# EAGLE board rx (EAGLE 9.1.3)
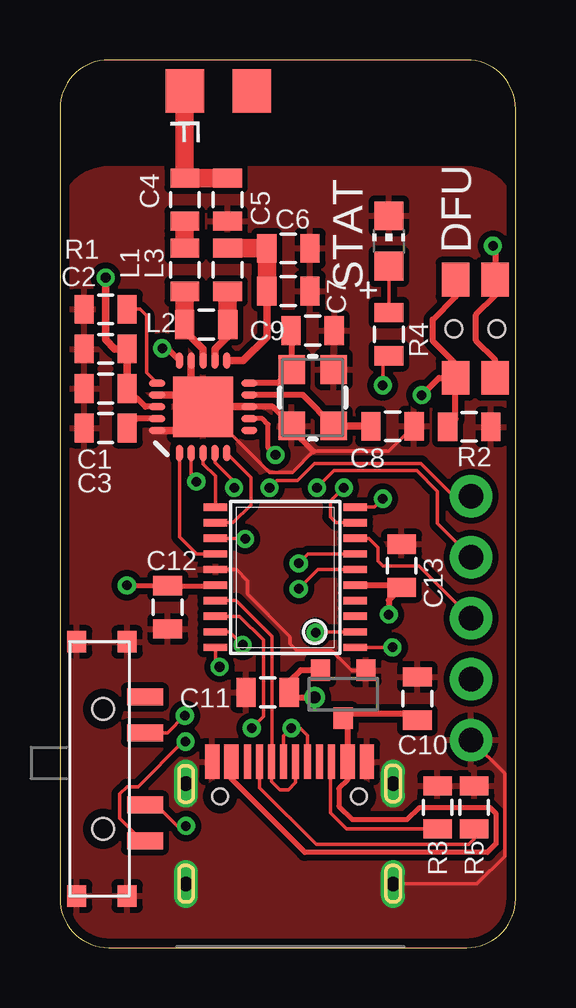
[diagram p0: board, top side]
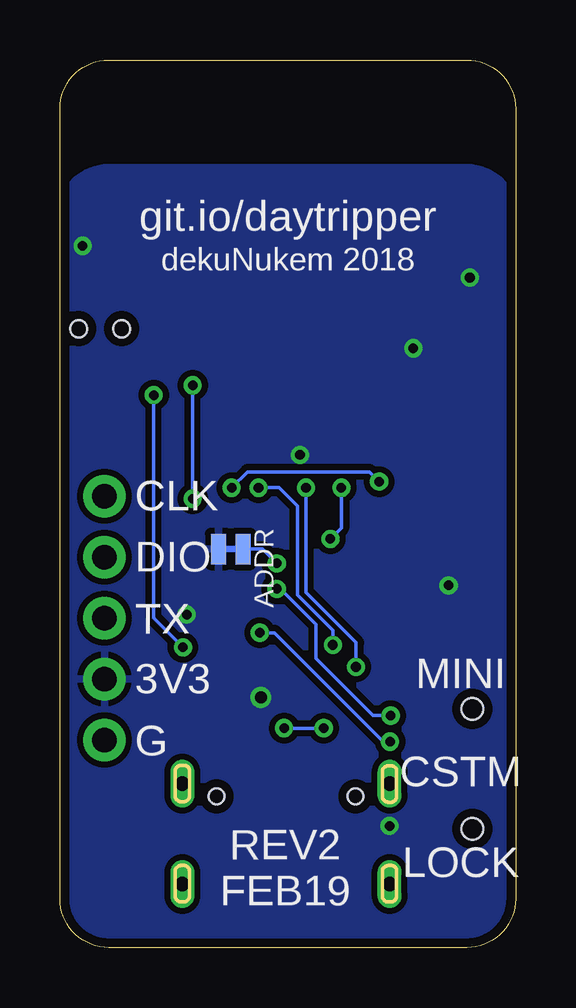
[diagram p1: board, bottom side, seen from below]

Size 19 x 37 mm. Coordinates in mm from the lower left corner, seen from the top.
Outline: 19,2.03 19,34.97 arc90 16.97,37 2.03,37 arc90 0,34.97 0,2.03 arc90 2.03,0 16.97,0 arc90 19,2.03
Copper layers (1*16): Top 0.035mm / dielectric 1.5mm / Bottom 0.035mm
Design rules "SparkFun-2-layer-TIGHT *": minimum track width 6mil, minimum drill 15mil, track to track 6mil, track to pad 6mil, pad to pad 6mil, via to via 6mil, smd to smd 6mil, copper to edge 15mil, drill to drill 6mil, minimum pad ring 7mil, minimum via ring 7mil, stop-mask expansion 4mil, vias tented up to drill 25mil, thermal gap 10mil

## Footprints (pad centres in the part's own frame; a part is rotated, then mirrored left to right if it is on the bottom)
0805 = smd 0.8 x 1.2: 1 -0.9,0; 2 0.9,0
CHIP-LED0805 = smd 1.2 x 1.2: A 0,-1.05; C 0,1.05
SMT-JUMPER_2_NC_TRACE_NO-SILK = smd 0.635 x 1.27: 1 -0.508,0; 2 0.508,0
SW_3POS_FOOT_OFFICIAL = smd 0.9 x 0.8: P$1 0,0; P$2 0,2.1; P$4 10.6,2.1; P$5 10.6,0 | smd 0.7 x 1.5: P$3 2.3,2.85; P$6 3.8,2.85; P$7 6.8,2.85; P$8 8.3,2.85 | hole 0.9: 2.8,1.1; 7.8,1.1
TSSOP20 = smd 0.305 x 0.991: 1 -2.925,-2.918; 2 -2.275,-2.918; 3 -1.625,-2.918; 4 -0.975,-2.918; 5 -0.325,-2.918; 6 0.325,-2.918; 7 0.975,-2.918; 8 1.625,-2.918; 9 2.275,-2.918; 10 2.925,-2.918; 11 2.925,2.918; 12 2.275,2.918; 13 1.625,2.918; 14 0.975,2.918; 15 0.325,2.918; 16 -0.325,2.918; 17 -0.975,2.918; 18 -1.625,2.918; 19 -2.275,2.918; 20 -2.925,2.918
QFN20_ALT1 = smd 2.515 x 2.515: 0 0,0 | smd 0.686 x 0.293: 1 -1.925,0.986; 2 -1.925,0.493; 3 -1.925,0; 4 -1.925,-0.493; 5 -1.925,-0.986; 11 1.925,-0.986; 12 1.925,-0.493; 13 1.925,0; 14 1.925,0.493; 15 1.925,0.986 | smd 0.293 x 0.686: 6 -0.986,-1.925; 7 -0.493,-1.925; 8 0,-1.925; 9 0.493,-1.925; 10 0.986,-1.925; 16 0.986,1.925; 17 0.493,1.925; 18 0,1.925; 19 -0.493,1.925; 20 -0.986,1.925
SOT23R_INFINEON = smd 0.8 x 0.9: 1 -0.95,-1; 2 0.95,-1; 3 0,1
1X05 = drill 1.016 pad 1.778: 1 -6.35,0; 2 -3.81,0; 3 -1.27,0; 4 1.27,0; 5 3.81,0
USBC_16P_FOOT = smd 0.6 x 1.45: A1B12 0,0; A4B9 0.8,0; B4A9 5.65,0; B11A12 6.45,0 | smd 0.3 x 1.45: A5 1.975,0; A6 2.975,0; A7 3.475,0; A8 4.475,0; B5 4.975,0; B6 3.975,0; B7 2.475,0; B8 1.475,0 | drill 0.6 pad 1 long: P$13 -1.095,-0.915; P$14 7.545,-0.915; P$15 -1.095,-5.095; P$16 7.545,-5.095 | hole 0.65: 0.335,-1.445; 6.115,-1.445
C1206 = smd 1.6 x 1.8: 1 -1.4,0; 2 1.4,0
342_SWICH_FOOT_HOLE = smd 1.4 x 1.15: P$1 -2.05,-0.825; P$2 -2.05,0.825; P$3 2.05,0.825; P$4 2.05,-0.825 | hole 0.7: 0,0.9; 0,-0.9
CRYSTAL-SMD-3.2X2.5MM = smd 1.2 x 1.1: 1 -1.175,-0.875; 2 1.175,-0.875; 3 1.175,0.875; 4 -1.175,0.875

## Placement (x,y rotation side)
C1  100nF  [0805]  1.91,23.3 180 top
C2  2.2nF  [0805]  1.91,24.96 180 top
C3  100nF  [0805]  1.91,21.65 180 top
C4  1.5pF  [0805]  5.21,31.18 90 top
C5  1pF  [0805]  6.99,31.18 270 top
C6  2.2nF  [0805]  9.53,29.15 0 top
C7  4.7pF  [0805]  9.53,27.37 0 top
C8  22pF  [0805]  13.87,21.73 0 top
C9  22pF  [0805]  10.54,25.72 0 top
C10  4.7uF  [0805]  14.91,10.38 90 top
C11  4.7uF  [0805]  8.66,10.63 180 top
C12  100nF  [0805]  4.5,14.18 270 top
C13  100nF  [0805]  14.25,15.92 90 top
L1  3.9nH  [0805]  5.21,28.26 90 top
L2  8.2nH  [0805]  6.1,25.97 0 top
L3  2.7nH  [0805]  6.99,28.26 90 top
LED2  [CHIP-LED0805]  13.72,29.45 0 top
R1  22K  [0805]  1.91,26.61 180 top
R2  22K  [0805]  17.07,21.7 0 top
R3  5.1K  [0805]  15.75,5.84 90 top
R4  5.1K  [0805]  13.72,25.57 270 top
R5  5.1K  [0805]  17.27,5.84 90 top
SJ1  JUMPER-SMT_2_NC_TRACE_NO-SILK  [SMT-JUMPER_2_NC_TRACE_NO-SILK]  11.88,16.61 0 bottom
U$1  SW_3POS_DEVSW_3POS_OFFICIAL  [SW_3POS_FOOT_OFFICIAL]  0.7,12.75 270 top
U$2  STM32F042F4  [TSSOP20]  9.4,15.43 90 top
U$3  NRF24L01ALT1  [QFN20_ALT1]  5.97,22.54 90 top
U$4  XC6206_DEV  [SOT23R_INFINEON]  11.81,10.56 180 top
U$5  PINHD5  [1X05]  17.14,12.46 270 top
U$6  USBC_16P  [USBC_16P_FOOT]  6.35,7.75 0 top
U$7  1206ANT_DEV  [C1206]  6.6,35.71 0 top
U$10  324_SW324_SWITCH_FOOT_HOLE  [342_SWICH_FOOT_HOLE]  17.32,25.79 90 top
Y1  CRYSTAL-26MHZSMD-3.2X2.5  [CRYSTAL-SMD-3.2X2.5MM]  10.54,22.92 90 top

## Library data of the parts
C1-C13 = clock
L1-L3 = basicBoard
LED2 R1-R5 = joyAnalog
SJ1 = SparkFun-Jumpers
U$1 U$4 U$7 U$10 = 3pos_slide_switch
U$2 = tx
U$3 = nRF24L01-Chip-v13
U$5 = adafruit_changed
U$6 = my_usbc_16p
Y1 = SparkFun-Clocks; PROD_ID: XTAL-12454

## Nets
+3V3: C1.1 C2.1 C11.1 C12.1 C13.1 SJ1.1 U$1.P$7 U$2.5 U$2.16 U$3.7 U$3.15 U$3.18 U$4.2 U$5.4 U$10.P$1 U$10.P$4
+5V: C10.1 U$4.3 U$6.A4B9 U$6.B4A9
GND: C1.2 C2.2 C3.2 C5.2 C6.2 C7.2 C8.2 C9.2 C10.2 C11.2 C12.2 C13.2 LED2.C R1.2 R2.2 R3.2 R5.2 U$1.P$1 U$1.P$2 U$1.P$4 U$1.P$5 U$2.15 U$3.0 U$3.8 U$3.14 U$3.17 U$3.20 U$4.1 U$5.5 U$6.A1B12 U$6.B11A12 U$6.P$13 U$6.P$14 U$6.P$15 U$6.P$16 Y1.2 Y1.4
N$1: C3.1 U$3.19
N$2: R1.1 U$3.16
N$3: L1.1 L2.1 U$3.13
N$4: C4.1 L1.2
N$5: C4.2 C5.1 U$7.1
N$6: L2.2 L3.1 U$3.12
N$7: C8.1 U$3.9 Y1.1
N$8: C6.1 C7.1 L3.2 U$3.11
N$9: C9.1 U$3.10 Y1.3
N$10: U$1.P$8 U$2.2
N$11: R2.1 U$2.1 U$10.P$2 U$10.P$3
N$12: U$2.17 U$6.A7 U$6.B7
N$13: U$2.18 U$6.A6 U$6.B6
N$14: U$2.12 U$3.5
N$15: U$2.13 U$3.4
N$16: U$2.11 U$3.3
N$17: U$2.19 U$5.2
N$18: LED2.A R4.1
N$19: SJ1.2 U$2.7
N$20: U$2.20 U$5.1
N$21: U$2.8 U$5.3
N$22: U$2.14 U$3.1
N$23: R4.2 U$2.10
N$24: U$2.9 U$3.2
N$25: R3.1 U$6.B5
N$26: U$1.P$6 U$2.6
N$27: R5.1 U$6.A5

## Tracks (layer width: path | path; a pad name or v marks a point on that pad's centre or on a via)
+3V3  (via drill 0.4, 0.5)
  Top 0.152: v5.26,5.07 4.89,5.07 4.01,5.95 U$1.P$7
  Top 0.203: U$3.7 8.44,22.05 8.69,21.81 8.69,20.84 v8.99,20.54 | v2.79,15.1 4.48,15.1 C12.1 6.45,15.08 U$2.16
  Top 0.254: U$3.15 4.47,24.98 v4.27,24.98 | U$3.18 3.57,22.54 C1.1 | v13.72,13.88 13.72,14.48 C13.1 14.16,15.11 U$2.5 | U$4.2 10.03,11.56 9.56,11.09 C11.1 9.77,10.43 v10.62,10.43 | v18.06,29.25 18.15,29.16 U$10.P$4 18.15,27.18 17.35,26.38 17.35,25.31 18.15,24.51 U$10.P$1
  Top 0.305: C1.1 C2.1 2.29,24.96 1.91,25.34 v1.91,27.93
  pour Bottom (isolate 0.254): 19,2.03 19,30.48 arc90 16.97,32.51 2.03,32.51 arc90 0,30.48 0,2.03 arc90 2.03,0 16.97,0 arc90
+5V
  Top 0.203: U$6.B4A9 12,7 11.63,6.63 11.63,5.89 12.19,5.33 14.48,5.33 14.99,5.84 17.93,5.84 18.19,5.59 18.19,4.32 17.83,3.96 10.21,3.96 7.15,7.02 U$6.A4B9
  Top 0.254: C10.1 14.63,9.75 12.01,9.75 U$4.3 12,9.37 U$6.B4A9
GND
  Top 0.152: C8.2 13.73,20.69 10.57,20.69 9.69,19.81 8.74,19.81 6.25,22.3 5.97,22.3 | 9.67,21.59 Y1.4 | U$4.1 12.17,11.56 11.33,12.39 9.86,12.39 9.6,12.65 9.6,12.95 7.82,14.73 7.82,15.29 7.36,15.76 U$2.15 | U$5.5 18.54,7.25 18.54,3.81 17.38,2.65 U$6.P$16
  Top 0.254: Y1.4 8.87,22.54 8.56,22.54 U$3.8 | 10.57,20.69 9.67,21.59
  Top 0.305: U$3.8 7.37,22.54 U$3.0 | U$3.0 5.48,22.54 5.48,23.05 | 5.48,23.05 U$3.14 | U$3.17 5.48,23.04 5.48,23.05 | U$3.20 5.97,21.56 5.97,22.3 U$3.0
  pour Top (isolate 0.254): 2.03,0 16.97,0 arc90 19,2.03 19,30.48 arc90 16.97,32.51 2.03,32.51 arc90 0,30.48 0,2.03 arc90
N$1
  Top 0.254: U$3.19 3.2,22.05 C3.1
N$2
  Top 0.152: R1.1 3.35,26.61 3.61,26.35 3.61,23.97 U$3.16
N$3
  Top 0.305: U$3.13 5.97,24.96 5.2,25.73 L2.1 5.21,25.98
  Top 0.762: 5.21,25.98 L1.1
N$4
  Top 0.762: L1.2 C4.1
N$5
  Top 0.305: C4.2
  Top 0.762: C5.1 C4.2 | U$7.1 C4.2
N$6
  Top 0.305: U$3.12 6.46,24.94 7,25.48 L2.2 6.99,25.98
  Top 0.762: 6.99,25.98 L3.1
N$7
  Top 0.254: U$3.9 10.13,23.04 Y1.1 11.45,21.78
  Top 0.305: C8.1 11.5,21.73 11.45,21.78
N$8
  Top 0.305: C6.1 | C7.1 8.62,25.45 7.64,24.47 U$3.11
  Top 0.762: C6.1 L3.2 | C6.1 C7.1
N$9
  Top 0.254: U$3.10 9.1,23.53 Y1.3 9.67,25.69 C9.1
N$10  (via drill 0.4)
  Top 0.152: v10.67,13.12 10.7,13.16 U$2.2 | v5.23,8.59 5.13,8.59 3.25,6.71 2.79,6.71 2.49,6.4 2.49,5.38 3.43,4.45 U$1.P$8
  Bottom 0.152: v10.67,13.12 10.06,13.12 5.52,8.59 v5.23,8.59
N$11  (via drill 0.4)
  Top 0.152: U$2.1 v13.86,12.51 v13.87,12.51
  Top 0.254: U$10.P$3 16.5,27.13 15.54,26.18 15.54,25.28 16.4,24.43 16.4,23.85 U$10.P$2 | v15.09,23.03 15.8,23.74 U$10.P$2 | R2.1 16.5,22.03 U$10.P$2
  Bottom 0.152: v13.87,12.51 15.09,13.73 v15.09,23.03
N$12
  Top 0.152: U$2.17 7.35,14.46 8.84,12.97 8.84,7.76 U$6.B7 8.82,6.92 9.17,6.58 9.53,6.58 9.82,6.88 U$6.A7
N$13  (via drill 0.4)
  Top 0.152: U$2.18 7.49,13.81 8.48,12.82 8.48,9.63 v8,9.14 | U$6.B6 10.32,8.85 10.03,9.14 v9.65,9.14 9.32,8.82 U$6.A6
  Bottom 0.152: v8,9.14 v9.65,9.14
N$14
  Top 0.152: U$3.5 7.98,19.6 7.98,18.46 7.23,17.71 U$2.12
N$15  (via drill 0.4)
  Top 0.152: U$2.13 7.7,17.06 v7.72,17.03 | U$3.4 6.46,20.22 7.26,19.42 v7.26,19.17
  Bottom 0.152: v7.26,19.17 7.26,17.49 v7.72,17.03
N$16
  Top 0.152: U$3.3 5.97,20.16 6.48,19.65 U$2.11
N$17  (via drill 0.4)
  Top 0.152: U$2.19 7.08,13.16 v7.62,12.61 | v10.72,19.17 11.43,19.88 14.88,19.88 15.75,19.02 15.75,17.67 U$5.2
  Bottom 0.152: v7.62,12.61 7.62,13.22 9.09,14.7 9.09,18.41 9.86,19.17 v10.72,19.17
N$18
  Top 0.152: LED2.A R4.1
N$19  (via drill 0.4)
  Top 0.152: U$2.7 10.35,16.41 v9.96,16.02
  Bottom 0.152: SJ1.2 10.55,16.61 v9.96,16.02
N$20  (via drill 0.4)
  Top 0.152: U$2.20 6.48,11.88 v6.66,11.7 | v8.74,19.17 9.04,19.47 9.91,19.47 10.62,20.18 15.06,20.18 16.43,18.81 U$5.1
  Bottom 0.152: v6.66,11.7 6.66,12.72 8.74,14.8 v8.74,19.17
N$21
  Top 0.152: U$2.8 12.88,17.06 13.26,16.68 13.26,16.12 13.46,15.92 14.96,15.92 U$5.3
N$22
  Top 0.152: U$2.14 5.69,16.41 4.98,17.11 U$3.1
N$23  (via drill 0.4)
  Top 0.152: v13.46,23.43 13.46,24.41 R4.2 | U$2.10 13.11,18.36 v13.46,18.71
  Bottom 0.152: v13.46,18.71 v13.46,23.43
N$24  (via drill 0.4)
  Top 0.152: v11.84,19.17 11.28,18.61 11.28,17.95 11.52,17.71 U$2.9 | U$3.2 5.48,19.64 v5.69,19.42
  Bottom 0.152: v5.69,19.42 6.1,19.83 11.18,19.83 v11.84,19.17
N$25
  Top 0.152: R3.1 11.95,4.94 11.27,5.62 11.27,7.7 U$6.B5
N$26  (via drill 0.4)
  Top 0.152: v9.96,14.95 10.76,15.76 U$2.6 | U$1.P$6 4.49,8.95 v5.21,9.67
  Bottom 0.152: v9.96,14.95 9.8,14.95 8.33,13.48 8.33,12.06 5.94,9.67 v5.21,9.67
N$27
  Top 0.152: R5.1 17.27,4.52 17.04,4.29 10.69,4.29 8.32,6.66 U$6.A5

## Text on the board
tNames: STAT | DFU
bNames: git.io/daytripper | dekuNukem 2018 | CLK | ADDR | DIO | TX | MINI | 3V3 | G | CSTM | LOCK | REV2 / FEB19